# Altium PCB PCB1.PcbDoc
Units mm, origin at the board's own origin, x right, y up, seen from the top; angles counter-clockwise.
Board outline 50.8 x 101.6 mm, 2 copper layers (Top Layer, Bottom Layer); 16 components, 38 nets, 76 pads, 0 vias.
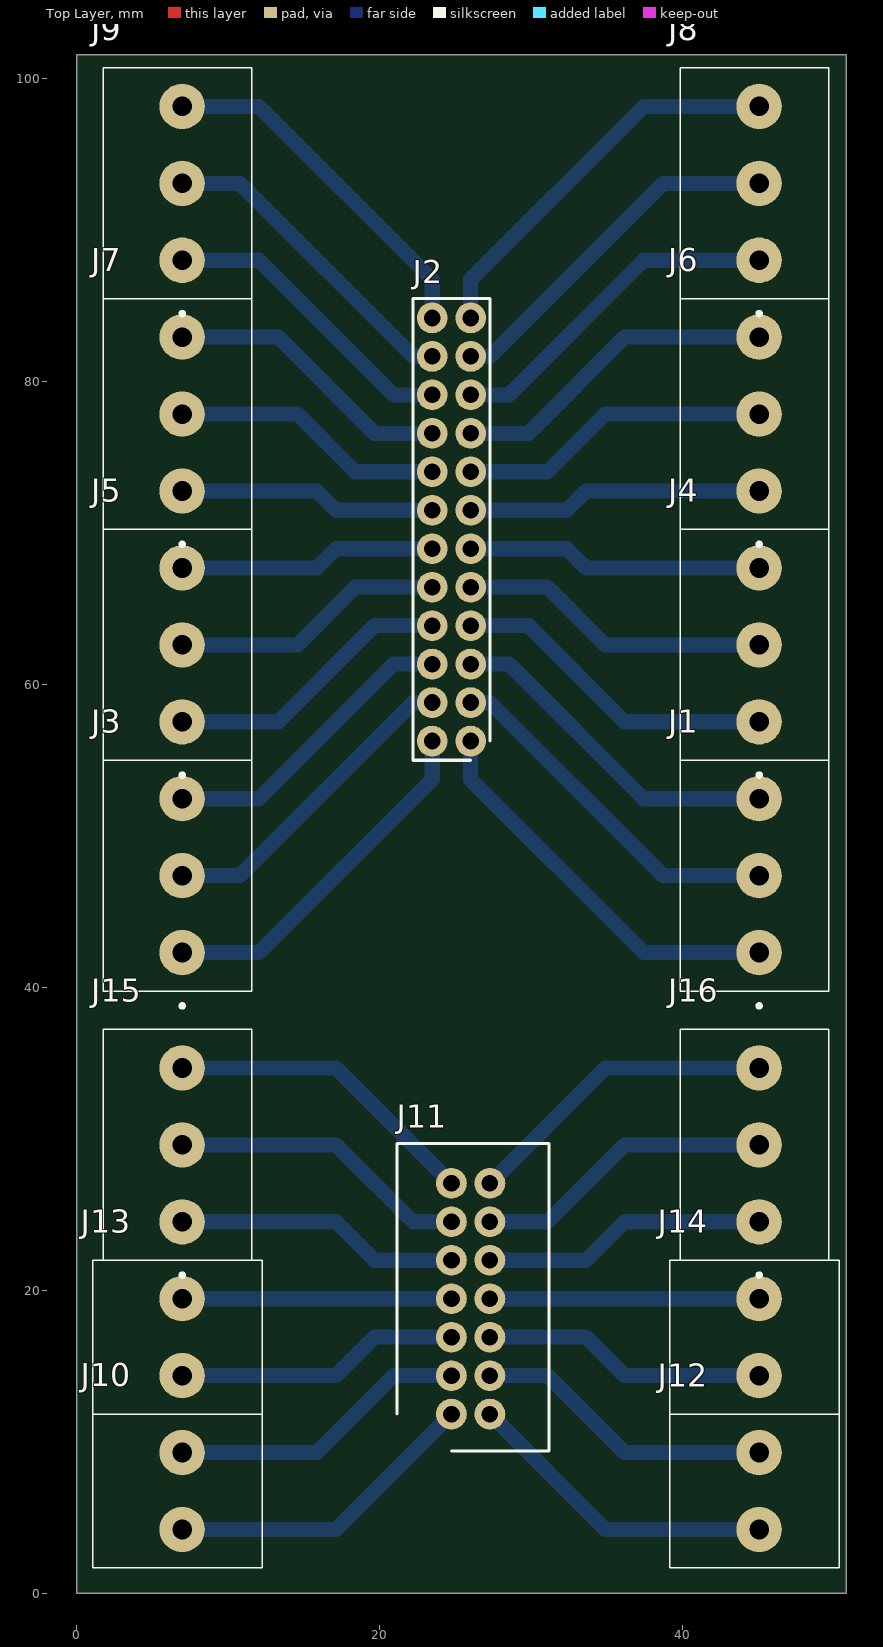
[diagram p0: Top Layer view]
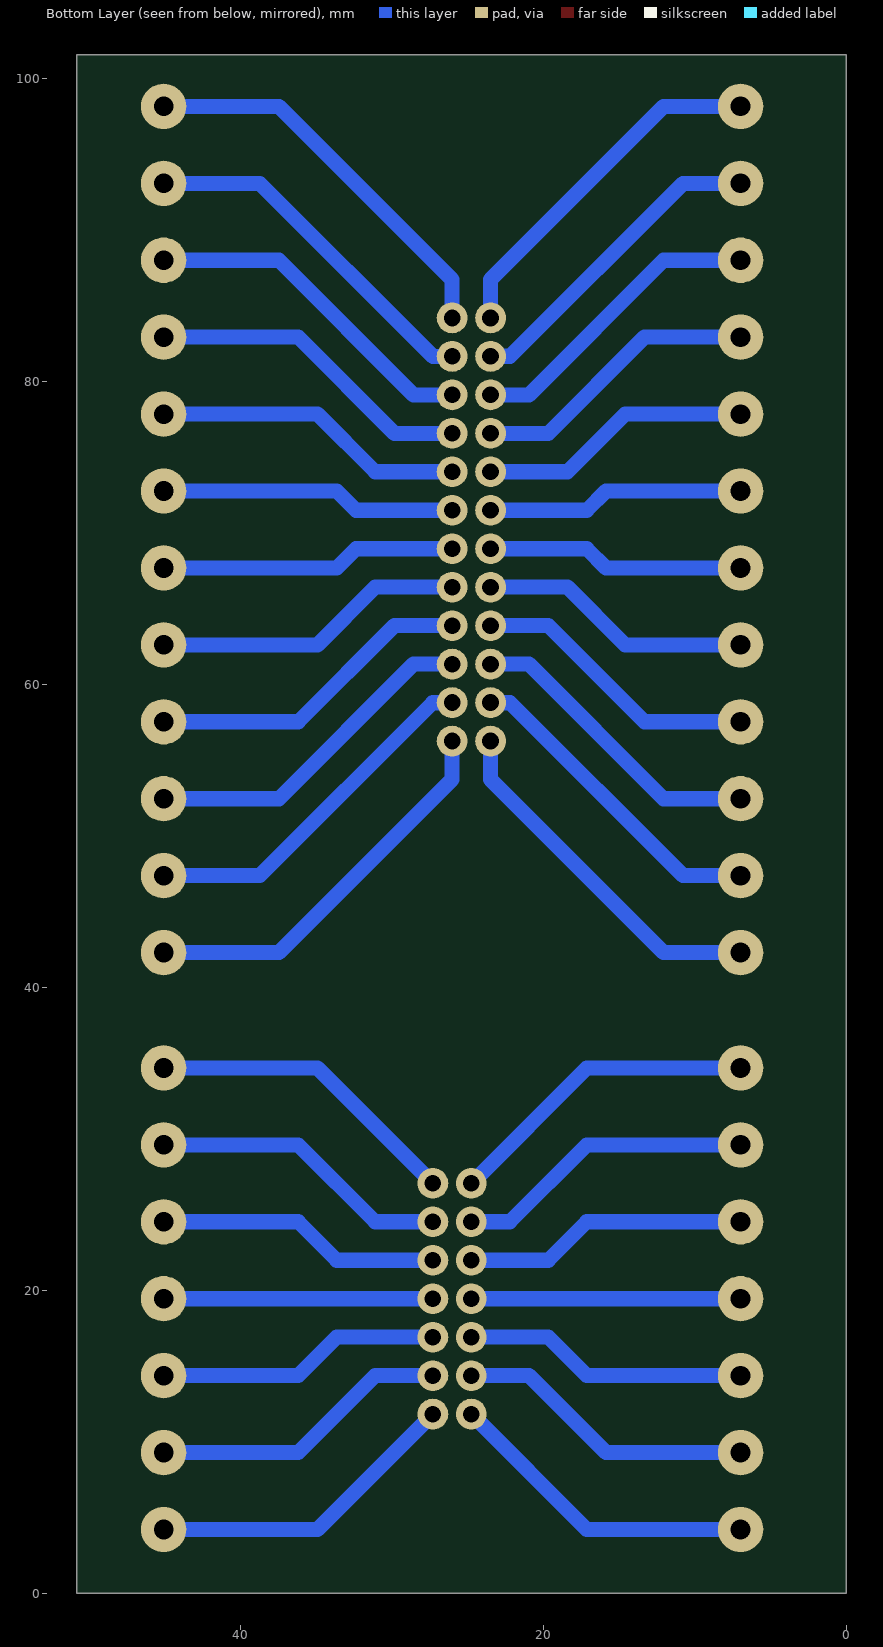
[diagram p1: Bottom Layer view, seen from below]

## Layer stack, top to bottom
Top Solder: solder mask 0.0102, Solder Resist, Dk 3.5
Top Layer: signal copper 0.0356
Dielectric 1: dielectric 0.32, FR-4, Dk 4.8
Bottom Layer: signal copper 0.0356
Bottom Solder: solder mask 0.0102, Solder Resist, Dk 3.5

## Board outline
0,0 50.8,0 50.8,101.6 0,101.6

## Design rules (kind name [scope] priority, off if disabled: settings)
Clearance [All] p1: gap=0.254 ignorepadtopadclearanceinfootprint=FALSE except(0: Arc-Hole Track-Hole SMDPad-Hole THPad-Hole Via-Hole Fill-Hole Poly-Hole Region-Hole Text-Hole)
PolygonConnect [All] p1: connectstyle=Relief reliefconductorwidth=0.254 reliefentries=4 polygonreliefangle="90 Angle" airgapwidth=0.254
RoutingVias [All] p1: holewidth=0.711 width=1.27 viastyle="Through Hole" minholewidth=0.711 minwidth=1.27 maxholewidth=0.711 maxwidth=1.27
SolderMaskExpansion [All] p1: expansion=0.102
Width [All] p1: maxlimit=1 minlimit=1 preferedwidth=1
30 further rules are at their usual default settings.

## Classes and differential pairs
component class Sheet1: J1 J2 J3 J4 J5 J6 J7 J8 J9 J10 J12 J13 J14 J15 J16

## Components (designator, comment, footprint, x,y, rotation, side; value= is the part's Value field where it differs from the comment)
J1 "1985917" 1985917 45.062,42.31 r90 top
J2 "90151-2124" RHDR24W64P254_2X12_3033X498X870P 26.012,56.28 r90 top
J3 "1985917" 1985917 6.962,42.31 r90 top
J4 "1985917" 1985917 45.062,57.55 r90 top
J5 "1985917" 1985917 6.962,57.55 r90 top
J6 "1985917" 1985917 45.062,72.79 r90 top
J7 "1985917" 1985917 6.962,72.79 r90 top
J8 "1985917" 1985917 45.062,88.03 r90 top
J9 "1985917" 1985917 6.962,88.03 r90 top
J10 "1711725" 1711725 6.962,4.21 r90 top
J11 "0901301214" SHDR14W65P254_2X7_2012X975X1110P 24.742,11.83 r90 top
J12 "1711725" 1711725 45.062,4.21 r90 top
J13 "1711725" 1711725 6.962,14.37 r90 top
J14 "1711725" 1711725 45.062,14.37 r90 top
J15 "1985917" 1985917 6.962,24.53 r90 top
J16 "1985917" 1985917 45.062,24.53 r90 top

## Footprints (in the part's own frame and the unit in brackets; to place one, negate y for a bottom-side part, rotate by r counter-clockwise, add the part's x,y. Pads: shape width x height; smd on the part's side, far side on the other; paste and mask are expansions set on the pad)
1711725 [mm]
  round 3 hole 1.3: 1(0,0) 2(5.08,0)
  silkscreen extent -2.54,-5.3 7.62,5.9
1985917 [mm]
  round 3 hole 1.3: 1(0,0) 2(5.08,0) 3(10.16,0)
  silkscreen extent -3.62,-4.6 12.7,5.2
RHDR24W64P254_2X12_3033X498X870P [mil]
  round 80 hole 43.31: 1(0,0) 2(0,100) 3(100,0) 4(100,100) 5(200,0) 6(200,100) 7(300,0) 8(300,100) 9(400,0) 10(400,100) 11(500,0) 12(500,100) 13(600,0) 14(600,100) 15(700,0) 16(700,100) 17(800,0) 18(800,100) 19(900,0) 20(900,100) 21(1000,0) 22(1000,100) 23(1100,0) 24(1100,100)
  silkscreen extent -50,-50 1150,150
SHDR14W65P254_2X7_2012X975X1110P [mil]
  round 80 hole 43.31: 1(0,0) 2(0,-100) 3(100,0) 4(100,-100) 5(200,0) 6(200,-100) 7(300,0) 8(300,-100) 9(400,0) 10(400,-100) 11(500,0) 12(500,-100) 13(600,0) 14(600,-100)
  silkscreen extent -96,-254 704,142

## Part data
J1 J3 J4 J5 J6 J7 J8 J9 J15 J16: "PCB Terminal Block 1985917", Manufacturer_Name="Phoenix Contact", Datasheet Link=https://media.digikey.com/pdf/Data%20Sheets/Phoenix%20Contact%20PDFs/Multi-Postion%20PCTerminal%20Blocks.pdf, Geometry.Height=13.95mm, Manufacturer_Part_Number=1985917
J2: "Headers & Wire Housings C-Grid PCB Conn DR Vt Tn-A 24Ckt", Manufacturer_Name=Molex, Datasheet Link=https://www.molex.com/pdm_docs/sd/901512124_sd.pdf, Geometry.Height=8.7mm, Manufacturer_Part_Number=90151-2124
J10 J12 J13 J14: "PCB terminal block, nominal current: 24 A, rated voltage (III/2): 400 V, nominal cross section: 2.5 mm?, Number of potentials: 2, Number of rows: 1, Number of positions per row: 2, product range: MKDS 3, pitch: 5.08 mm, connection method: Screw connection with tension sleeve, mounting: Wave soldering, conductor/PCB connection direction: 0 ?, color: green, Pin layout: Linear pinning, Solder pin [P]: 5 mm, type of packaging: packed in cardboard. The article can be aligned to create different nos. of positions", Manufacturer_Name="Phoenix Contact", Datasheet Link=http://www.phoenixcontact.net/product/1711725, Geometry.Height=18.2mm, Manufacturer_Part_Number=1711725
J11: "Headers & Wire Housings C-GRID III 2.54MM VT SHRD 2X07", Manufacturer_Name=Molex, Datasheet Link=https://www.molex.com/pdm_docs/sd/901301214_sd.pdf, Geometry.Height=11.1mm, Manufacturer_Part_Number=0901301214

## Nets (pads, with @x,y where several pads share a name; then routed paths per layer and width w, separated by ;. In a path a pad name is that pad's centre, name@x,y a point inside that pad or via, vN(x,y) a via of type N, cw(c..) or ccw(c..) an arc to the next point about the centre after c; other vN are vias at no path point)
NetJ1_1: J1.1 J2.1 | length 26.3
  Bottom Layer w1: J2.1 26.012,53.74 37.442,42.31 J1.1
NetJ1_2: J1.2 J2.3 | length 23.8
  Bottom Layer w1: J2.3 26.021,58.811 27.291,58.811 38.712,47.39 J1.2
NetJ1_3: J1.3 J2.5 | length 22.7
  Bottom Layer w1: J2.5 28.552,61.36 37.442,52.47 J1.3
NetJ2_2: J2.2 J3.1 | length 23.8
  Bottom Layer w1: J3.1 12.042,42.31 23.472,53.74 J2.2
NetJ2_4: J2.4 J3.2 | length 21.2
  Bottom Layer w1: J3.2 10.772,47.39 22.193,58.811 23.463,58.811 J2.4
NetJ2_6: J2.6 J3.3 | length 20.2
  Bottom Layer w1: J3.3 12.042,52.47 20.932,61.36 J2.6
NetJ2_7: J2.7 J4.1 | length 21.7
  Bottom Layer w1: J2.7 29.822,63.9 36.172,57.55 J4.1
NetJ2_8: J2.8 J5.1 | length 19.1
  Bottom Layer w1: J5.1 13.312,57.55 19.662,63.9 J2.8
NetJ2_9: J2.9 J4.2 | length 20.6
  Bottom Layer w1: J2.9 31.092,66.44 34.902,62.63 J4.2
NetJ2_10: J2.10 J5.2 | length 18.1
  Bottom Layer w1: J5.2 14.582,62.63 18.392,66.44 J2.10
NetJ2_11: J2.11 J4.3 | length 19.6
  Bottom Layer w1: J2.11 32.362,68.98 33.632,67.71 J4.3
NetJ2_12: J2.12 J5.3 | length 17
  Bottom Layer w1: J5.3 15.852,67.71 17.122,68.98 J2.12
NetJ2_13: J2.13 J6.1 | length 19.6
  Bottom Layer w1: J2.13 32.362,71.52 33.632,72.79 J6.1
NetJ2_14: J2.14 J7.1 | length 17
  Bottom Layer w1: J7.1 15.852,72.79 17.122,71.52 J2.14
NetJ2_15: J2.15 J6.2 | length 20.6
  Bottom Layer w1: J2.15 31.092,74.06 34.902,77.87 J6.2
NetJ2_16: J2.16 J7.2 | length 18.1
  Bottom Layer w1: J7.2 14.582,77.87 18.392,74.06 J2.16
NetJ2_17: J2.17 J6.3 | length 21.7
  Bottom Layer w1: J2.17 29.822,76.6 36.172,82.95 J6.3
NetJ2_18: J2.18 J7.3 | length 19.1
  Bottom Layer w1: J7.3 13.312,82.95 19.662,76.6 J2.18
NetJ2_19: J2.19 J8.1 | length 22.7
  Bottom Layer w1: J2.19 28.552,79.14 37.442,88.03 J8.1
NetJ2_20: J2.20 J9.1 | length 20.2
  Bottom Layer w1: J9.1 12.042,88.03 20.932,79.14 J2.20
NetJ2_21: J2.21 J8.2 | length 23.8
  Bottom Layer w1: J2.21 27.282,81.68 38.712,93.11 J8.2
NetJ2_22: J2.22 J9.2 | length 21.2
  Bottom Layer w1: J9.2 10.772,93.11 22.193,81.689 23.463,81.689 J2.22
NetJ2_23: J2.23 J8.3 | length 26.3
  Bottom Layer w1: J2.23 26.012,86.76 37.442,98.19 J8.3
NetJ2_24: J2.24 J9.3 | length 23.8
  Bottom Layer w1: J9.3 12.042,98.19 23.472,86.76 J2.24
NetJ10_1: J10.1 J11.1 | length 20.9
  Bottom Layer w1: J10.1 17.122,4.21 J11.1
NetJ10_2: J10.2 J11.3 | length 19.9
  Bottom Layer w1: J10.2 15.852,9.29 20.932,14.37 J11.3
NetJ11_2: J11.2 J12.1 | length 20.9
  Bottom Layer w1: J11.2 34.902,4.21 J12.1
NetJ11_4: J11.4 J12.2 | length 19.9
  Bottom Layer w1: J11.4 31.092,14.37 36.172,9.29 J12.2
NetJ11_5: J11.5 J13.1 | length 18.8
  Bottom Layer w1: J13.1 17.122,14.37 19.662,16.91 J11.5
NetJ11_6: J11.6 J14.1 | length 18.8
  Bottom Layer w1: J11.6 33.632,16.91 36.172,14.37 J14.1
NetJ11_7: J11.7 J13.2 | length 17.8
  Bottom Layer w1: J13.2 J11.7
NetJ11_8: J11.8 J14.2 | length 17.8
  Bottom Layer w1: J11.8 J14.2
NetJ11_9: J11.9 J15.1 | length 18.8
  Bottom Layer w1: J15.1 17.122,24.53 19.662,21.99 J11.9
NetJ11_10: J11.10 J16.1 | length 18.8
  Bottom Layer w1: J11.10 33.632,21.99 36.172,24.53 J16.1
NetJ11_11: J11.11 J15.2 | length 19.9
  Bottom Layer w1: J15.2 17.122,29.61 22.202,24.53 J11.11
NetJ11_12: J11.12 J16.2 | length 19.9
  Bottom Layer w1: J11.12 31.092,24.53 36.172,29.61 J16.2
NetJ11_13: J11.13 J15.3 | length 20.9
  Bottom Layer w1: J15.3 17.122,34.69 J11.13
NetJ11_14: J11.14 J16.3 | length 20.9
  Bottom Layer w1: J11.14 34.902,34.69 J16.3